# Altium PCB IRDiode.PcbDoc
Units mil, origin at the board's own origin, x right, y up, seen from the top; angles counter-clockwise.
Board outline 270 x 485 mil, 2 copper layers (Top Layer, Bottom Layer); 2 components, 2 nets, 4 pads, 0 vias.
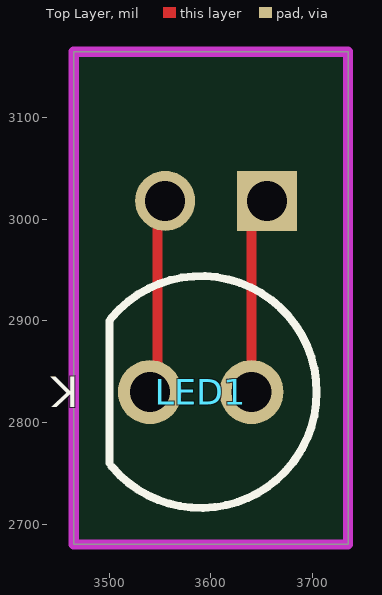
[diagram p0: Top Layer view]
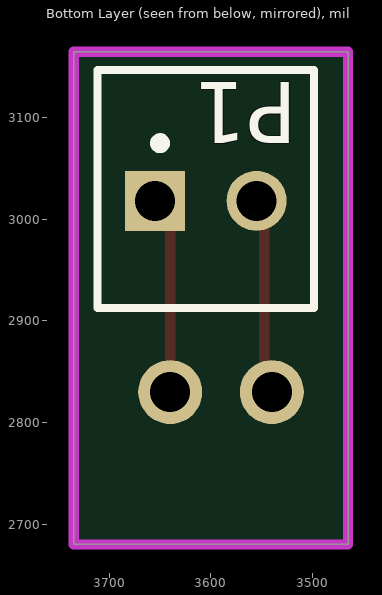
[diagram p1: Bottom Layer view, seen from below]

## Layer stack, top to bottom
Top Solder: solder mask 0.4, Solder Resist, Dk 3.5
Top Layer: signal copper 1.4
Dielectric 1: dielectric 12.6, FR-4, Dk 4.8
Bottom Layer: signal copper 1.4
Bottom Solder: solder mask 0.4, Solder Resist, Dk 3.5

## Board outline
3465,2680 3465,3165 3735,3165 3735,2680

## Design rules (kind name [scope] priority, off if disabled: settings)
Clearance [All] p1: gap=10 ignorepadtopadclearanceinfootprint=FALSE except(0: Arc-Hole Track-Hole SMDPad-Hole THPad-Hole Via-Hole Fill-Hole Poly-Hole Region-Hole Text-Hole)
PolygonConnect [All] p1: connectstyle=Relief reliefconductorwidth=10 reliefentries=4 polygonreliefangle="90 Angle" airgapwidth=10
RoutingVias [All] p1: holewidth=28 width=50 viastyle="Through Hole" minholewidth=28 minwidth=50 maxholewidth=28 maxwidth=50
SolderMaskExpansion [All] p1: expansion=4 istentingtop=FALSE
Width [All] p1: maxlimit=10 minlimit=10 preferedwidth=10
30 further rules are at their usual default settings.

## Components (designator, comment, footprint, x,y, rotation, side; value= is the part's Value field where it differs from the comment)
LED1 "TSHG6200" "Type 5mm" 3590,2830 r180 top
P1 "61900211121" 61900211121 3605,3030 r0 bottom

## Footprints (in the part's own frame and the unit in brackets; to place one, negate y for a bottom-side part, rotate by r counter-clockwise, add the part's x,y. Pads: shape width x height; smd on the part's side, far side on the other; paste and mask are expansions set on the pad)
61900211121 [mm] "2.54mm Male Locking Header, 2p"
  rect 1.5x1.5 hole 1: 1(1.27,0.3)
  round 1.5 hole 1: 2(-1.27,0.3)
  silkscreen extent -2.71,-2.98 2.71,2.98, body extent -2.54,-2.9 2.54,2.9, height 11.53
"Type 5mm" [mm] "THT, LED-5mm, 2pin- Body 5.8mm"
  round 1.6 hole 1: 1(1.27,0) 2(-1.27,0)
  silkscreen extent -2.9,-2.9 2.29,2.9, body extent -2.9,-2.9 2.5,2.9, height 11.7

## Part data
LED1: library part CMP-1489-00005-1, Emitting color=Green, Manufacturer="Wuerth Elektronik", PartNumber=151053GS03000, ComponentLink1Description="Manufacturer URL", ComponentLink1URL=http://www.we-online.com, ComponentLink2Description=Datasheet, ComponentLink2URL=http://katalog.we-online.de/pbs/datasheet/7448042001.pdfhttp://katalog.we-online.de/pbs/datasheet/7448042001.pdfhttp://katalog.we-online.de/pbs/datasheet/7448042001.pdfhttp://katalog.we-online.de/pbs/datasheet/151053GS03000.pdf, PackageReference="Type 5mm"
P1: library part CMP-1502-00584-1, "Male Locking Header WR-WTB, THT, Vertical, pitch 2.54 mm, 1 x 2 position", Contact Resistance=20mOhm, Manufacturer="Wurth Elektronik", Operating Temperature=-40to105degC, Working Voltage=250VAC, Datasheet URL=https://katalog.we-online.de/em/datasheet/6190xx11121.pdf, Gender=Male, Manufacturer URL=http://www.we-online.de, Mounting Technology=THT, Orientation=Vertical, Package Reference=61900211121, Packaging=Bag, Part Number=61900211121, Pitch=2.54mm, Position=1x2, Publisher=WurthElektronik

## Nets (pads, with @x,y where several pads share a name; then routed paths per layer and width w, separated by ;. In a path a pad name is that pad's centre, name@x,y a point inside that pad or via, vN(x,y) a via of type N, cw(c..) or ccw(c..) an arc to the next point about the centre after c; other vN are vias at no path point)
NetLED1_1: LED1.1 P1.2 | length 194.4
  Top Layer w10: LED1.1 3547.5,2837.5 3547.5,3010.69 P1.2
NetLED1_2: LED1.2 P1.1 | length 194.4
  Top Layer w10: LED1.2 3640,3003.19 P1.1

## Keep-outs
Keep-Out Layer:
  the board outline again, w10

## Text inside footprints (layer, text, board x,y; h text height)
LED1: Top Overlay "K" at 3470,2845 h30 r180; Mechanical 15 "K" at 3470,2845 h30 r180